# Altium PCB PCB.PcbDoc
Units mil, origin at the board's own origin, x right, y up, seen from the top; angles counter-clockwise.
Board outline 3505 x 2360 mil, 2 copper layers (Top Layer, Bottom Layer); 33 components, 18 nets, 124 pads, 0 vias.
Unrouted connection lines stored in the file: 62.
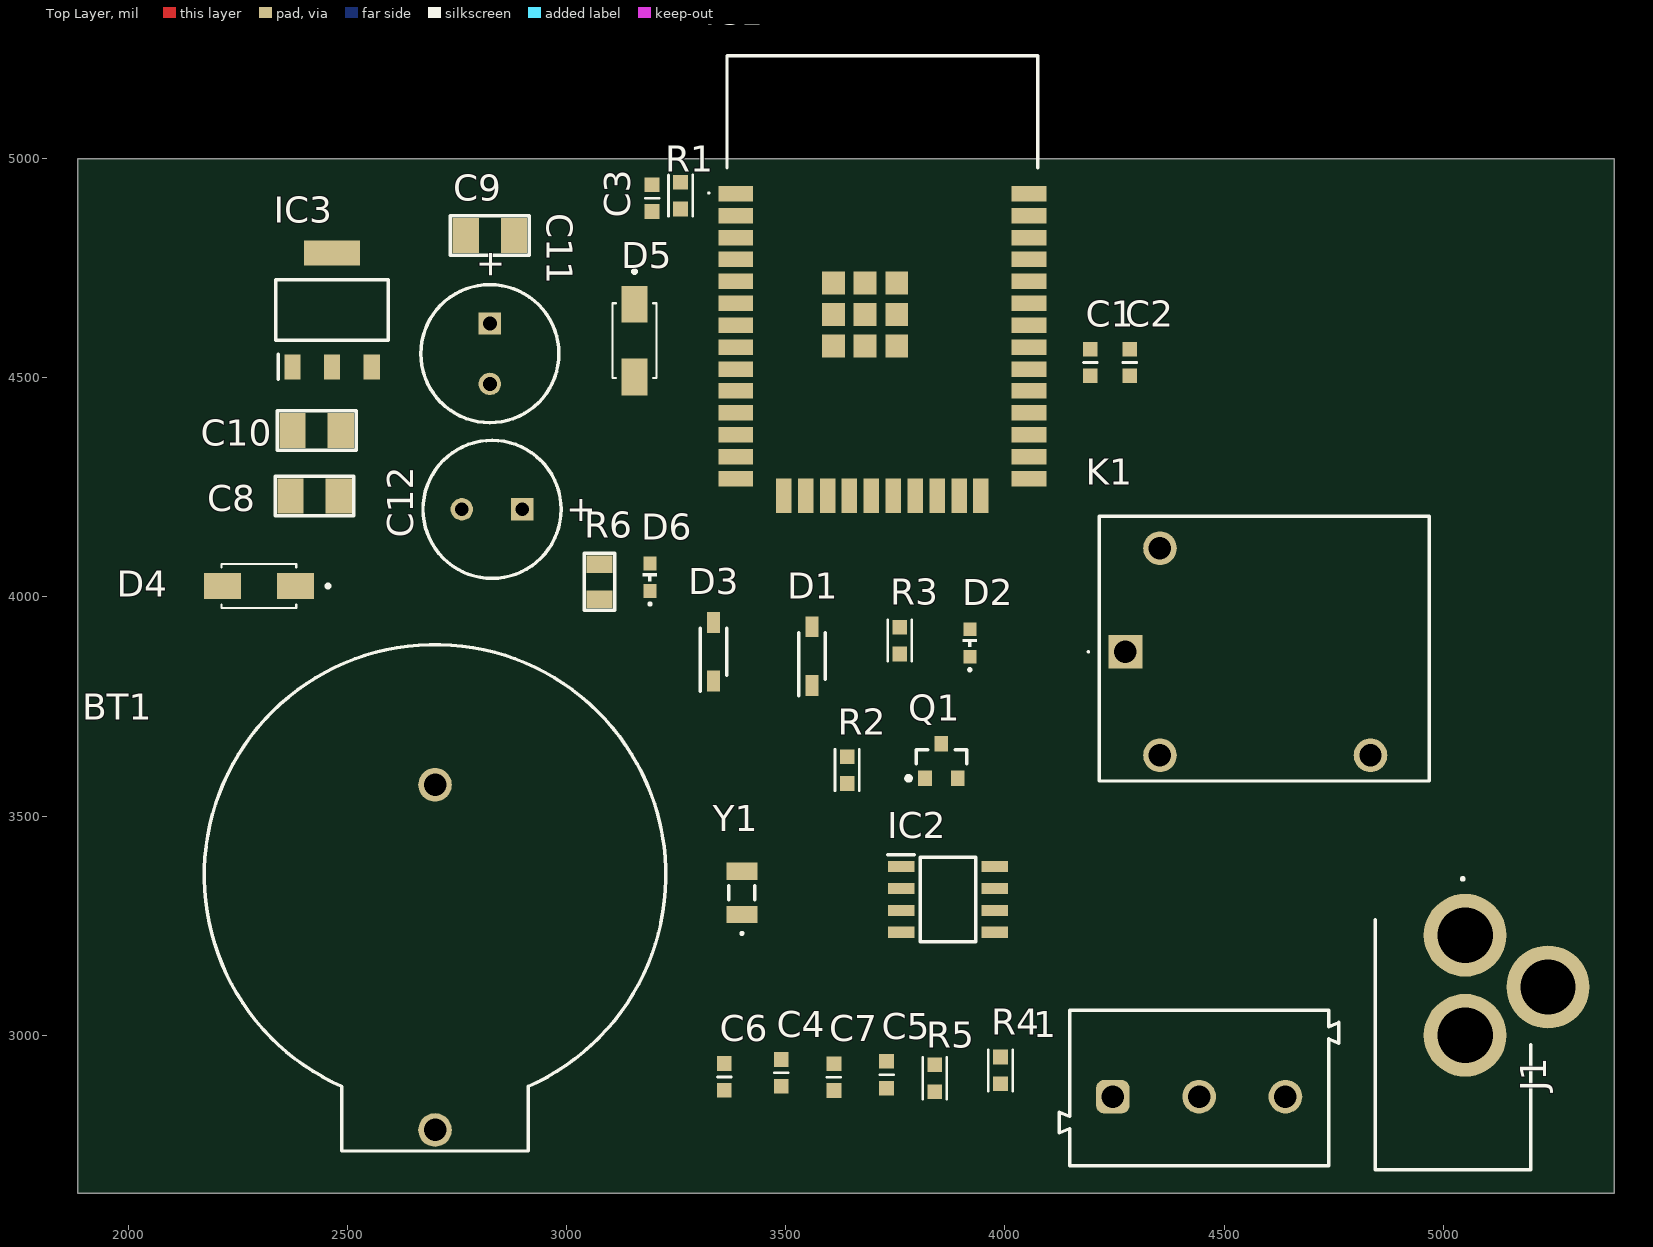
[diagram p0: Top Layer view]
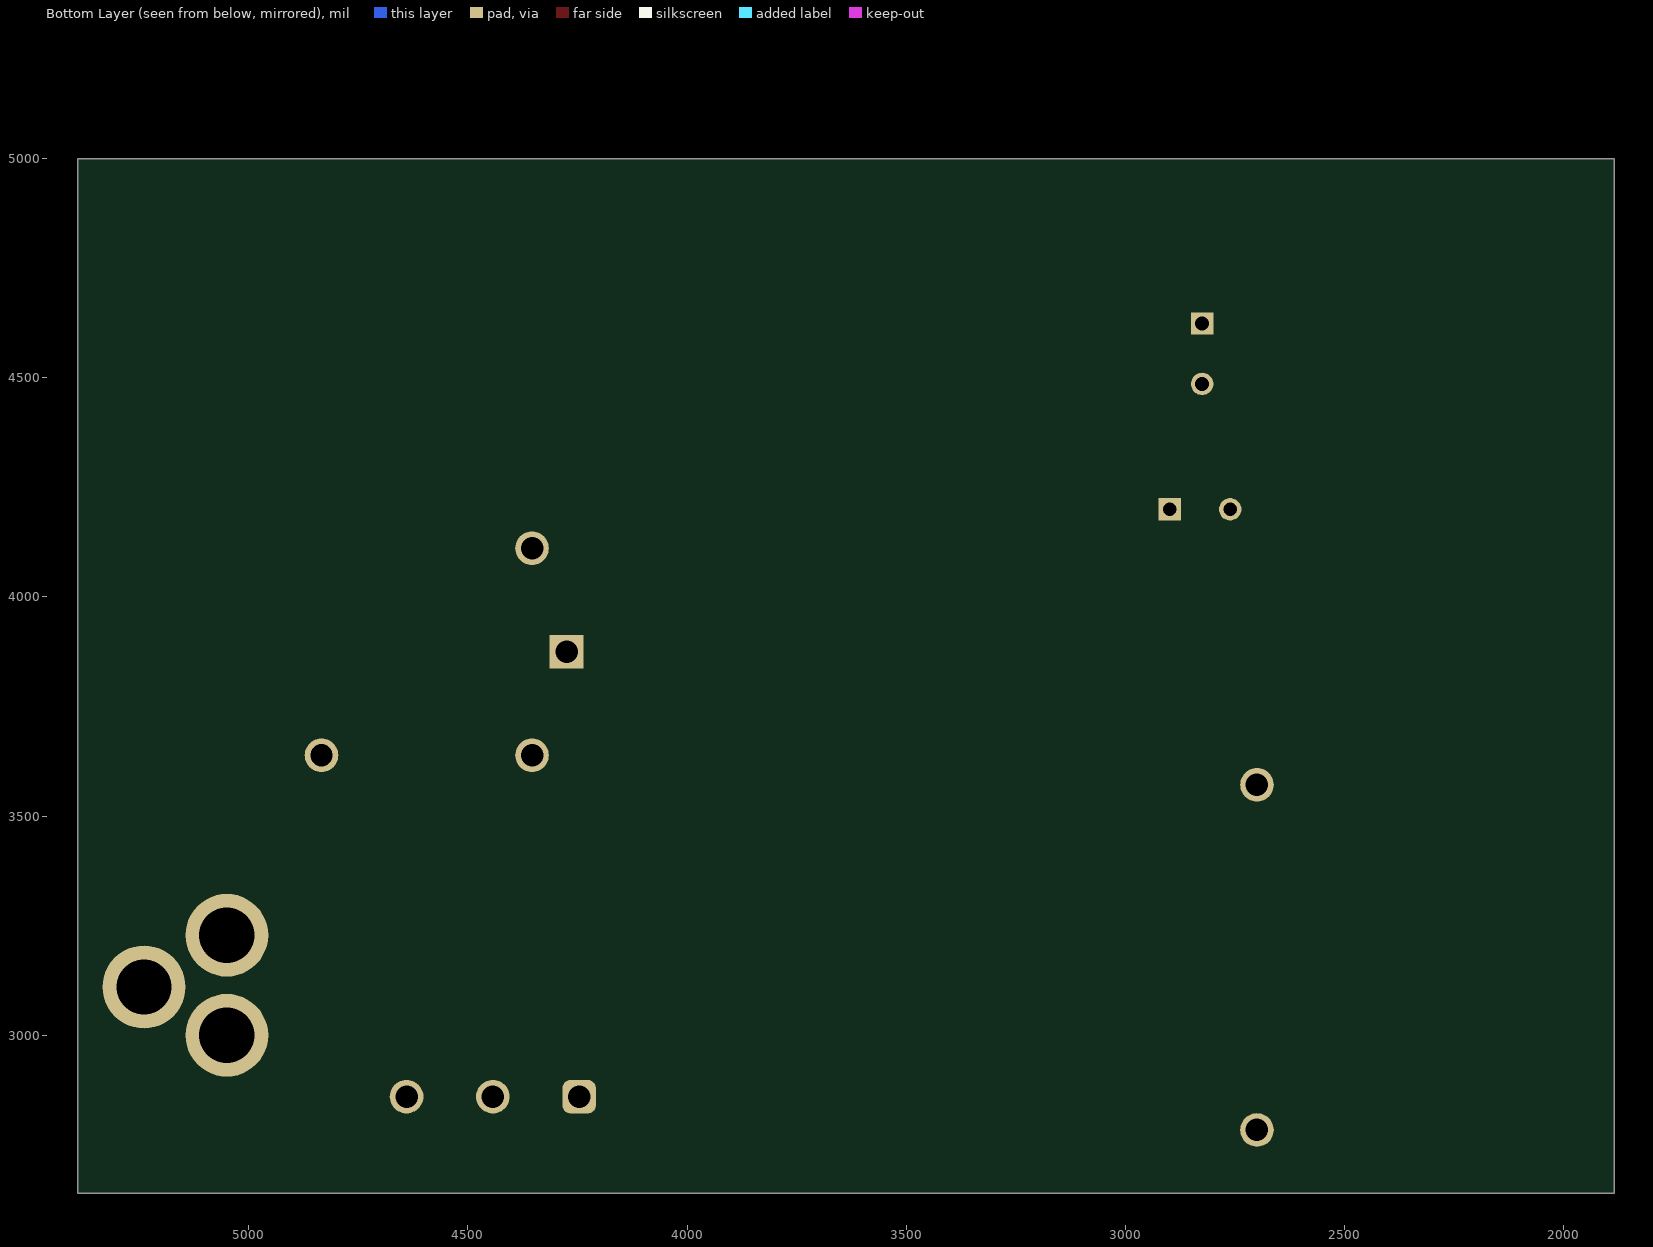
[diagram p1: Bottom Layer view, seen from below]

## Layer stack, top to bottom
Top Solder: solder mask 0.4, Solder Resist, Dk 3.5
Top Layer: signal copper 1.4
Dielectric 1: dielectric 12.6, FR-4, Dk 4.8
Bottom Layer: signal copper 1.4
Bottom Solder: solder mask 0.4, Solder Resist, Dk 3.5

## Board outline
1885,2640 5390,2640 5390,5000 1885,5000

## Design rules (kind name [scope] priority, off if disabled: settings)
Clearance [All] p1: gap=10 ignorepadtopadclearanceinfootprint=FALSE except(0: Arc-Hole Track-Hole SMDPad-Hole THPad-Hole Via-Hole Fill-Hole Poly-Hole Region-Hole Text-Hole)
PolygonConnect [All] p1: connectstyle=Relief reliefconductorwidth=10 reliefentries=4 polygonreliefangle="90 Angle" airgapwidth=10
RoutingVias [All] p1: holewidth=28 width=50 viastyle="Through Hole" minholewidth=28 minwidth=50 maxholewidth=28 maxwidth=50
SolderMaskExpansion [All] p1: expansion=4 istentingtop=FALSE
Width [All] p1: maxlimit=10 minlimit=10 preferedwidth=10
30 further rules are at their usual default settings.

## Classes and differential pairs
component class "relay and rtc": 1 BT1 C4 C5 C6 C7 D1 D2 D3 IC2 K1 Q1 R2 R3 R4 R5 Y1
component class "power supply": C8 C9 C10 C11 C12 D4 D5 D6 IC3 J1 R6
component class main: C1 C2 C3 IC1 R1

## Components (designator, comment, footprint, x,y, rotation, side; value= is the part's Value field where it differs from the comment)
1 "691101710003" 691101710003 4443.16,2879.69 r0 top
BT1 "79578211" 79578211 2700,3365 r90 top
C1 "22µF" SMD-0603C 4195,4535 r180 top
C2 "0.10µF" SMD-0603C 4285,4535 r180 top
C3 "0.10µF" SMD-0603C 3195,4910 r180 top
C4 "0.10µF" SMD-0603C 3490,2914.49 r0 top
C5 "10µF" SMD-0603C 3730,2910 r0 top
C6 "10pF" SMD-0603C 3360,2905 r0 top
C7 "10pF" SMD-0603C 3610,2904.49 r0 top
C8 "104" SMD-1206C 2425,4230 r270 top value=0.033µF
C9 "10pF" SMD-1206C 2825,4825 r90 top value=0.033µF
C10 "100nF" SMD-1206C 2430,4380 r270 top value=0.033µF
C11 "25V/470uF" WCAP-ATUL_8x11.5x3.5 2825,4555 r90 top value="220 uF"
C12 "25V/470uF" WCAP-ATUL_8x11.5x3.5 2830,4200 r0 top value="220 uF"
D1 "1N4148W-7-F" SOD3716X145N 3560,3865 r90 top
D2 "Red, 2V, 140°" WL-SMCD_0603 3920,3895 r90 top
D3 "1N4148W-7-F" SOD3716X145N 3335,3875 r90 top
D4 "SS14" DIOM4325X250N 2298.27,4025 r180 top
D5 "TVS5V" DIOM4325X250N 3155,4585 r270 top
D6 "Red, 2V, 140°" WL-SMCD_0603 3190,4045 r90 top
IC1 "ESP32-WROOM-32E-H4" ESP32WROOM32UEM113EH2800UH3Q0 3720.35,4732.6 r0 top
IC2 "MCP79402T-I_SN" SOIC127P600X175-8N 3870,3310 r0 top
IC3 "AMS1117-3.3" SOT229P700X180-4N 2465,4655 r90 top
J1 "694106301002" 694106301002_1 5199.61,2692.91 r90 top
K1 "AZ943-1AH-12DE" AZ9431AH12DE 4275,3875 r0 top
Q1 "BC847ALT1" ONSC-SOT-23-3-318-08_V 3855,3625.63 r90 top
R1 "10k" SMD-0603-RES 3260,4915.51 r180 top
R2 "1k" SMD-0603-RES 3640,3605 r0 top
R3 "10k" SMD-0603-RES 3760,3900.51 r0 top
R4 "4.7k" SMD-0603-RES 3990,2920 r0 top
R5 "4.7k" SMD-0603-RES 3840,2902 r0 top
R6 "1K" SMD-0805-RES 3075,4035 r180 top value=1
Y1 "SC32S-7PF20PPM" SC32S7PF20PPM 3400,3325 r90 top

## Footprints (in the part's own frame and the unit in brackets; to place one, negate y for a bottom-side part, rotate by r counter-clockwise, add the part's x,y. Pads: shape width x height; smd on the part's side, far side on the other; paste and mask are expansions set on the pad)
79578211 [mm] "Battery Holder"
  round 1.95 hole 1.3: 1(-14.755,0) 2(5.245,0)
  silkscreen extent -15.97,-13.37 13.37,13.37, body extent -15.97,-13.38 13.33,13.37, height 9.6
691101710003 [mm] "5,00mm - modular - blue - Horizontal entry with pressure clamp - 12,6mm height - 03p"
  rrect50% 1.95x1.95 hole 1.3: 1(-5,-0.5)
  round 1.95 hole 1.3: 2(0,-0.5) 3(5,-0.5)
  silkscreen extent -8.1,-4.5 8.1,4.5, body extent -8.1,-4.5 8.1,4.5, height 12.65
694106301002_1 [mm]
  round 4.8 hole 3.2: 1(13.6,3.8) 2(7.8,3.8) 3(10.6,-1)
  silkscreen extent 0,0 16.93,9, body extent 0.12,-1.22 14.62,8.28, height 11.02
AZ9431AH12DE [mm]
  rect 1.95x1.95 hole 1.3: 1(0,0)
  round 1.95 hole 1.3: 2(2,-6) 3(14.2,-6) 5(2,6)
  silkscreen extent -2.2,-7.49 17.6,7.86, body extent -1.53,-7.49 17.6,7.86, height 16.05
DIOM4325X250N [mm]
  rect 2.12x1.5 smd: A(2.115,0) C(-2.115,0)
  silkscreen extent -4.1,-1.28 2.16,1.28
ESP32WROOM32UEM113EH2800UH3Q0 [mm]
  rect 2x0.9 smd: 1(-8.5,4.76) 2(-8.5,3.49) 3(-8.5,2.22) 4(-8.5,0.95) 5(-8.5,-0.32) 6(-8.5,-1.59) 7(-8.5,-2.86) 8(-8.5,-4.13) 9(-8.5,-5.4) 10(-8.5,-6.67) 11(-8.5,-7.94) 12(-8.5,-9.21) 13(-8.5,-10.48) 14(-8.5,-11.75) 25(8.5,-11.75) 26(8.5,-10.48) 27(8.5,-9.21) 28(8.5,-7.94) 29(8.5,-6.67) 30(8.5,-5.4) 31(8.5,-4.13) 32(8.5,-2.86) 33(8.5,-1.59) 34(8.5,-0.32) 35(8.5,0.95) 36(8.5,2.22) 37(8.5,3.49) 38(8.5,4.76)
  rect 0.9x2 smd: 15(-5.715,-12.75) 16(-4.445,-12.75) 17(-3.175,-12.75) 18(-1.905,-12.75) 19(-0.635,-12.75) 20(0.635,-12.75) 21(1.905,-12.75) 22(3.175,-12.75) 23(4.445,-12.75) 24(5.715,-12.75)
  rect 1.33x1.33 smd: 39(-1,-2.24) 40(-2.835,-4.075) 41(-1,-4.075) 42(0.835,-4.075) 43(0.835,-2.24) 44(0.835,-0.405) 45(-1,-0.405) 46(-2.835,-0.405) 47(-2.835,-2.24)
  silkscreen extent -10.1,4.75 9,12.75, body extent -9,-13.25 9,5.95, height 3.2
ONSC-SOT-23-3-318-08_V [mm] "SOT23, 3-Leads, Body 2.92x1.3mm, Pitch 0.95mm"
  rect 0.9x0.8 smd: 1(-1,0.95) 2(-1,-0.95) 3(1,0)
  silkscreen extent -1.12,-1.46 0.65,2.02, body extent -0.65,-1.46 0.65,1.46, height 1.11
SC32S7PF20PPM [mm]
  rect 1x1.8 smd: 1(-1.25,0) 2(1.25,0)
  silkscreen extent -2.4,-0.75 0.4,0.75, body extent -1.65,-0.8 1.65,0.8, height 0.84
SMD-0603-RES [mm]
  rect 0.85x0.85 smd: 1(0,0.775) 2(0,-0.775)
  silkscreen extent -0.7,-1.2 0.7,1.2, body extent -0.4,-0.85 0.4,0.85, height 0.56
SMD-0603C [mm]
  rect 0.85x0.85 smd: 1(0,0.775) 2(0,-0.775)
  silkscreen extent -0.4,0 0.4,0, body extent -0.4,-0.8 0.4,0.8, height 0.9
SMD-0805-RES [mil]
  rect 60x40 smd: 1(0,40) 2(0,-40)
  silkscreen extent -35,-65 35,65, body extent -24,-39 26,39, height 31
SMD-1206C [mil]
  rect 80x60 smd: 1(0,55) 2(0,-55)
  silkscreen extent -45,-90 45,90, body extent -31,-63 32,63, height 39
SOD3716X145N [mm]
  rect 1.2x0.75 smd: 1(-1.7,0) 2(1.7,0)
  silkscreen extent -2.3,-0.77 1.35,0.77, body extent -1.85,-0.77 1.85,0.77, height 1.45
SOIC127P600X175-8N [mm]
  rect 1.525x0.65 smd: 1(-2.712,1.905) 2(-2.712,0.635) 3(-2.712,-0.635) 4(-2.712,-1.905) 5(2.712,-1.905) 6(2.712,-0.635) 7(2.712,0.635) 8(2.712,1.905)
  silkscreen extent -3.47,-2.45 1.6,2.58, body extent -3,-2.45 3,2.45, height 1.75
SOT229P700X180-4N [mm]
  rect 1.45x0.95 smd: 1(-3.3,2.29) 2(-3.3,0) 3(-3.3,-2.29)
  rect 1.45x3.25 smd: 4(3.3,0)
  silkscreen extent -4.03,-3.25 1.75,3.25, body extent -3.35,-3.15 3.35,3.15, height 1.8
WCAP-ATUL_8x11.5x3.5 [mm] "Aluminum Electrolytic Capacitors, 8x11.5mm"
  rect 1.3x1.3 hole 0.8: 1(1.75,0)
  round 1.3 hole 0.8: 2(-1.75,0)
  silkscreen extent -4,-4 4,4, body extent -3.99,-4 4,4, height 11.81
WL-SMCD_0603 [mm] "SMD Mono-color Chip LED, body 1.6x0.8mm"
  rect 0.8x0.75 smd: 1(-0.8,0) 2(0.8,0)
  silkscreen extent -1.62,-0.4 0.22,0.4, body extent -0.8,-0.4 0.8,0.4, height 0.42

## Part data
1: "WR-TBL Series 101 Horizontal Entry Modular, THT, pitch 5mm, 3p", Manufacturer="Wurth Elektronik", Operating Temperature Max=105°C, Operating Temperature Min=-40°C, Rated Current=16A, Working Voltage=250V, Application="Pressure Clamp", Category="Terminal Blocks", ComponentLink1Description="Website Link", ComponentLink1URL=https://www.we-online.com/redexpert/article/691101710003?ad, ComponentLink2Description="Datasheet Link", ComponentLink2URL=https://www.we-online.com/redexpert/spec/691101710003?ad, Manufacturer Part Number=691101710003, Match Code=WR-TBL, Modularity=Yes, Mount="Through Hole", Number of Pins=3, Number of Rows=1, Orientation=Horizontal, Packaging=Box, Pitch=5mm
BT1: "WA-BCPH Battery Holder, THT, Battery Type 2450", Operating Temperature="-40 to +105degC", Battery Type=2450, ComponentLink1Description=Manufacturer, ComponentLink1URL=http://www.we-online.de, ComponentLink2Description=Datasheet, ComponentLink2URL=https://katalog.we-online.com/em/datasheet/79578211.pdf, Mounting Technology=THT, Packaging=Bag, Part Number=79578211, Published Date="September 2019", Publisher="Wurth Elektronik"
C1: library part GRM188R61A226ME15D, "CAP CER 22UF 10V X5R 0603", Digi-Key Part Number=490-10476-1-ND, Manufacturer="Murata Electronics North America", Operating Temperature="-55°C ~ 85°C", Package / Case="0603 (1608 Metric)", Ratings=-, Temperature Coefficient=X5R, Tolerance=±20%, Voltage=10V, @ qty=0, Applications="General Purpose", Datasheets=http://www.murata.com/~/media/webrenewal/support/library/catalog/products/capacitor/mlcc/c02e.pdf, Factory Stock=0, Features="Derating Recommended", Height - Seated (Max)=-, Image=//media.digikey.com/Renders/Murata%20Renders/ZRB-SERIES-0402.jpg, Lead Spacing=-, Lead Style=-, Minimum Quantity=1, Mounting Type="Surface Mount, MLCC", Packaging="Cut Tape (CT)", Part Number=GRM188R61A226ME15D, Part Status=Active, Quantity Available=179406, Series=GRM, Size / Dimension="0.063\" L x 0.031\" W (1.60mm x 0.80mm)", Thickness (Max)="0.039\" (1.00mm)", Unit Price (USD)=0.24
C2 C3 C4: library part GCJ188R71C104KA01D, "CAP CER 0.1UF 16V X7R 0603", Digi-Key Part Number=490-5796-1-ND, Manufacturer="Murata Electronics North America", Operating Temperature="-55°C ~ 125°C", Package / Case="0603 (1608 Metric)", Ratings=AEC-Q200, Temperature Coefficient=X7R, Tolerance=±10%, Voltage=16V, @ qty=0, Applications="Automotive, Boardflex Sensitive", Datasheets=http://www.murata.com/~/media/webrenewal/support/library/catalog/products/capacitor/mlcc/c03e.ashx, Factory Stock=0, Features="Soft Termination", Height - Seated (Max)=-, Image=//media.digikey.com/Renders/Murata%20Renders/0603%28LQG18%29.jpg, Lead Spacing=-, Lead Style=-, Minimum Quantity=1, Mounting Type="Surface Mount, MLCC", Packaging="Cut Tape (CT)", Part Number=GCJ188R71C104KA01D, Part Status=Active, Quantity Available=22473, Series=GCJ, Size / Dimension="0.063\" L x 0.031\" W (1.60mm x 0.80mm)", Thickness (Max)="0.035\" (0.90mm)", Unit Price (USD)=0.21
C5: library part GRM185R60J106ME15D, "CAP CER 10UF 6.3V X5R 0603", Digi-Key Part Number=490-10467-1-ND, Manufacturer="Murata Electronics North America", Operating Temperature="-55°C ~ 85°C", Package / Case="0603 (1608 Metric)", Ratings=-, Temperature Coefficient=X5R, Tolerance=±20%, Voltage=6.3V, @ qty=0, Applications="General Purpose", Datasheets=http://www.murata.com/~/media/webrenewal/support/library/catalog/products/capacitor/mlcc/c02e.pdf, Factory Stock=0, Features="Derating Recommended", Height - Seated (Max)=-, Image=//media.digikey.com/Renders/Murata%20Renders/ZRB-SERIES-0402.jpg, Lead Spacing=-, Lead Style=-, Minimum Quantity=1, Mounting Type="Surface Mount, MLCC", Packaging="Cut Tape (CT)", Part Number=GRM185R60J106ME15D, Part Status=Active, Quantity Available=25068, Series=GRM, Size / Dimension="0.063\" L x 0.031\" W (1.60mm x 0.80mm)", Thickness (Max)="0.022\" (0.55mm)", Unit Price (USD)=0.36
C6 C7: library part GCM1885C1H100FA16D, "CAP CER 10PF 50V NP0 0603", Digi-Key Part Number=490-12530-1-ND, Manufacturer="Murata Electronics North America", Operating Temperature="-55°C ~ 125°C", Package / Case="0603 (1608 Metric)", Ratings=AEC-Q200, Temperature Coefficient="C0G, NP0", Tolerance=±1%, Voltage=50V, @ qty=0, Applications=Automotive, Datasheets=http://psearch.en.murata.com/capacitor/product/GCM1885C1H100FA16%23.pdf, Factory Stock=0, Features=-, Height - Seated (Max)=-, Image=//media.digikey.com/Renders/Murata%20Renders/0603%28GCM188%29.jpg, Lead Spacing=-, Lead Style=-, Minimum Quantity=1, Mounting Type="Surface Mount, MLCC", Packaging="Cut Tape (CT)", Part Number=GCM1885C1H100FA16D, Part Status=Active, Quantity Available=652, Series=GCM, Size / Dimension="0.063\" L x 0.031\" W (1.60mm x 0.80mm)", Thickness (Max)="0.035\" (0.90mm)", Unit Price (USD)=0.11
C8: library part GC331AD72E333KX01D, "CAP CER 0.033UF 250V X7T 1206", Digi-Key Part Number=490-13989-1-ND, Manufacturer="Murata Electronics North America", Operating Temperature="-55°C ~ 125°C", Package / Case="1206 (3216 Metric)", Ratings=AEC-Q200, Temperature Coefficient=X7T, Tolerance=±10%, Voltage=250V, @ qty=0, Applications=Automotive, Datasheets=http://search.murata.co.jp/Ceramy/image/img/A01X/G101/ENG/GC331AD72E333KX01-01.pdf, Factory Stock=0, Features=-, Height - Seated (Max)=-, Image=//media.digikey.com/Renders/Murata%20Renders/1206(GC3)320x160.jpg, Lead Spacing=-, Lead Style=-, Minimum Quantity=1, Mounting Type="Surface Mount, MLCC", Packaging="Cut Tape (CT)", Part Number=GC331AD72E333KX01D, Part Status=Active, Quantity Available=3999, Series=GC3, Size / Dimension="0.126\" L x 0.063\" W (3.20mm x 1.60mm)", Thickness (Max)="0.039\" (1.00mm)", Unit Price (USD)=0.33
C9: library part GC331AD72E333KX01D, "CAP CER 10PF 50V NP0 1206", Digi-Key Part Number=490-13989-1-ND, Manufacturer="Murata Electronics North America", Operating Temperature="-55°C ~ 125°C", Package / Case="1206 (3216 Metric)", Ratings=AEC-Q200, Temperature Coefficient=X7T, Tolerance=±10%, Voltage=250V, @ qty=0, Applications=Automotive, Datasheets=http://search.murata.co.jp/Ceramy/image/img/A01X/G101/ENG/GC331AD72E333KX01-01.pdf, Factory Stock=0, Features=-, Height - Seated (Max)=-, Image=//media.digikey.com/Renders/Murata%20Renders/1206(GC3)320x160.jpg, Lead Spacing=-, Lead Style=-, Minimum Quantity=1, Mounting Type="Surface Mount, MLCC", Packaging="Cut Tape (CT)", Part Number=GC331AD72E333KX01D, Part Status=Active, Quantity Available=3999, Series=GC3, Size / Dimension="0.126\" L x 0.063\" W (3.20mm x 1.60mm)", Thickness (Max)="0.039\" (1.00mm)", Unit Price (USD)=0.33
C10: library part GC331AD72E333KX01D, "CAP CER 0.1UF 50V X7R 1206", Digi-Key Part Number=490-13989-1-ND, Manufacturer="Murata Electronics North America", Operating Temperature="-55°C ~ 125°C", Package / Case="1206 (3216 Metric)", Ratings=AEC-Q200, Temperature Coefficient=X7T, Tolerance=±10%, Voltage=250V, @ qty=0, Applications=Automotive, Datasheets=http://search.murata.co.jp/Ceramy/image/img/A01X/G101/ENG/GC331AD72E333KX01-01.pdf, Factory Stock=0, Features=-, Height - Seated (Max)=-, Image=//media.digikey.com/Renders/Murata%20Renders/1206(GC3)320x160.jpg, Lead Spacing=-, Lead Style=-, Minimum Quantity=1, Mounting Type="Surface Mount, MLCC", Packaging="Cut Tape (CT)", Part Number=GC331AD72E333KX01D, Part Status=Active, Quantity Available=3999, Series=GC3, Size / Dimension="0.126\" L x 0.063\" W (3.20mm x 1.60mm)", Thickness (Max)="0.039\" (1.00mm)", Unit Price (USD)=0.33
C11 C12: library part 860040474004, "WCAP-ATUL Aluminum Electrolytic Capacitors, 8x11.5mm, 25 Vdc, 220 uF", Operating Temperature="-40 °C up to +105 °C", Rated Voltage="25 Vdc", ComponentLink1Description=Manufacturer, ComponentLink1URL=http://www.we-online.de, ComponentLink2Description=Datasheet, ComponentLink2URL=http://katalog.we-online.com/pbs/datasheet/860040474004.pdf, Life Cycle=7000h, Part Number=860040474004, Published Date="Sep. 2017", Publisher="Wurth Elektronik", Size=8x11.5mm
D1 D3: "Diode", Manufacturer_Name="Diodes Incorporated", Mouser Part Number=621-1N4148W-F, Arrow Part Number=1N4148W-7-F, Arrow Price/Stock=https://www.arrow.com/en/products/1n4148w-7-f/diodes-incorporated?region=nac, Datasheet Link=https://componentsearchengine.com/Datasheets/2/1N4148W-7-F.pdf, Height=1.45mm, Manufacturer_Part_Number=1N4148W-7-F, Mouser Price/Stock=https://www.mouser.co.uk/ProductDetail/Diodes-Incorporated/1N4148W-7-F?qs=LHX0FizJzg7Ae9ZM8LTAWw%3D%3D
D2 D6: library part 150060RS55040, "WL-SMCD Mono-color Chip LED Diffused, SMT, size 0603, Red, 2V, 140°", Case/Size Code=0603, Emitting Color=Red, Forward Voltage=2V, Manufacturer="Wurth Elektronik", Operating Temperature Max=85°C, Operating Temperature Min=-40°C, Category="Signal LEDs", Chip Technology=AlInGaP, ComponentLink1Description="Website Link", ComponentLink1URL=https://www.we-online.com/redexpert/article/150060RS55040?ad, ComponentLink2Description="Datasheet Link", ComponentLink2URL=https://www.we-online.com/redexpert/spec/150060RS55040?ad, Dominant Wavelength=624nm, Height=0.4mm, Length=1.6mm, Luminous Intensity=90mcd, Manufacturer Part Number=150060RS55040, Match Code=WL-SMCD, Mount="Surface Mount", Packaging="Tape and Reel", Peak Wavelength=632nm, Viewing Angle=140°, Width=0.8mm
D4: Package=None, Availability=Unavailable, MP=SS14, Price=None
D5: library part SS14, Package=None, Availability=Unavailable, MP=SS14, Price=None
IC1: "Integrated Circuit", Manufacturer_Name="Espressif Systems", Mouser Part Number=356-ESP32WRM320EH3PS, Datasheet Link=https://www.espressif.com/sites/default/files/documentation/esp32-wroom-32e_esp32-wroom-32ue_datasheet_en.pdf, Height=3.25mm, Manufacturer_Part_Number=ESP32-WROOM-32E-H4, Mouser Price/Stock=https://www.mouser.co.uk/ProductDetail/Espressif-Systems/ESP32-WROOM-32E-H4?qs=Li%252BoUPsLEnuUxeqGSCz%252BcA%3D%3D
IC2: "Integrated Circuit", Arrow Part Number=MCP79402T-I/SN, Manufacturer_Name=Microchip, Mouser Part Number=579-MCP79402TISN, Arrow Price/Stock=https://www.arrow.com/en/products/mcp79402t-isn/microchip-technology?region=nac, Datasheet Link=https://componentsearchengine.com/Datasheets/1/MCP79402T-I_SN.pdf, Height=1.75mm, Manufacturer_Part_Number=MCP79402T-I/SN, Mouser Price/Stock=https://www.mouser.co.uk/ProductDetail/Microchip-Technology/MCP79402T-I-SN/?qs=ggQiQSXuoRU4tW%252BtaaWOXQ%3D%3D
IC3: "Integrated Circuit", Manufacturer_Name=Advanced, Datasheet Link=https://datasheet.datasheetarchive.com/originals/distributors/Datasheets-28/DSA-550594.pdf, Height=1.8mm, Manufacturer_Part_Number=AMS1117-3.3
J1: "Connector", Manufacturer_Name="Wurth Elektronik", Mouser Part Number=710-694106301002, Datasheet Link=https://datasheet.datasheetarchive.com/originals/distributors/Datasheets_SAMA/1c153bd2ba42bb51bda59ee4cd9765cd.pdf, Manufacturer_Part_Number=694106301002, Mouser Price/Stock=https://www.mouser.co.uk/ProductDetail/Wurth-Elektronik/694106301002?qs=a9WhcLg8qCwOEkcI62k5mA%3D%3D
K1: "Relay or Contactor", Manufacturer_Name="Zettler Group", Datasheet Link=https://www.azettler.com/pdfs/az943.pdf, Height=15.95mm, Manufacturer_Part_Number=AZ943-1AH-12DE
Q1: "General Purpose Transistor, NPN Silicon, 3-Pin SOT-23, Tape and Reel", Manufacturer="On Semiconductor", Supplier Part Number 1=BC847ALT1OSCT-ND, ComponentLink1Description="Manufacturer URL", ComponentLink1URL=http://www.onsemi.com/, ComponentLink2Description=Datasheet, ComponentLink2URL=http://www.onsemi.cn/pub_link/Collateral/BC846ALT1-D.PDF, ComponentLink3Description="Package Specification", ComponentLink3URL=http://www.onsemi.cn/pub_link/Collateral/318-08.PDF, DatasheetVersion="Rev. 11", fT Min (MHz)=100, IC Continuous (A)=0.1, Mounting Technology="Surface Mount", PackageDescription="3-Pin Small Outline Transistor, Body 2.92 x 1.3 mm, Pitch 0.95 mm", PackageReference=SOT-23-3-318-08, PackageVersion="Rev. AP, 11/2009", Packing="Tape and Reel", PartNumber=BC847ALT1, Polarity=NPN, ROHS=FALSE, Supplier 1=Digi-Key
R1 R3: library part ERJ-3EKF1002V, "RES SMD 10K OHM 1% 1/10W 0603", Digi-Key Part Number=P10.0KHCT-ND, Manufacturer="Panasonic Electronic Components", Operating Temperature="-55°C ~ 155°C", Package / Case="0603 (1608 Metric)", Power (Watts)="0.1W, 1/10W", Supplier Device Package=0603, Temperature Coefficient=±100ppm/°C, Tolerance=±1%, @ qty=1500, Composition="Thick Film", Datasheets=http://industrial.panasonic.com/www-cgi/jvcr13pz.cgi?E+PZ+3+AOA0002+ERJ3EKF1002V+7+WW, Factory Stock=0, Failure Rate=-, Features="Automotive AEC-Q200", Height - Seated (Max)="0.022\" (0.55mm)", Image=//media.digikey.com/Photos/Panasonic%20Photos/MFG_ERJ-P6W%20Series.jpg, Minimum Quantity=1, Number of Terminations=2, Packaging="Cut Tape (CT)", Part Number=ERJ-3EKF1002V, Part Status=Active, Quantity Available=6703141, Series=ERJ, Size / Dimension="0.063\" L x 0.031\" W (1.60mm x 0.80mm)", Unit Price (USD)=0.00379
R2: library part ERJ-3EKF1001V, "RES SMD 1K OHM 1% 1/10W 0603", Digi-Key Part Number=P1.00KHCT-ND, Manufacturer="Panasonic Electronic Components", Operating Temperature="-55°C ~ 155°C", Package / Case="0603 (1608 Metric)", Power (Watts)="0.1W, 1/10W", Supplier Device Package=0603, Temperature Coefficient=±100ppm/°C, Tolerance=±1%, @ qty=1500, Composition="Thick Film", Datasheets=http://industrial.panasonic.com/www-cgi/jvcr13pz.cgi?E+PZ+3+AOA0002+ERJ3EKF1001V+7+WW, Factory Stock=0, Failure Rate=-, Features="Automotive AEC-Q200", Height - Seated (Max)="0.022\" (0.55mm)", Image=//media.digikey.com/Photos/Panasonic%20Photos/MFG_ERJ-P6W%20Series.jpg, Minimum Quantity=1, Number of Terminations=2, Packaging="Cut Tape (CT)", Part Number=ERJ-3EKF1001V, Part Status=Active, Quantity Available=5218845, Series=ERJ, Size / Dimension="0.063\" L x 0.031\" W (1.60mm x 0.80mm)", Unit Price (USD)=0.00379
R4: library part ERJ-3EKF4701V, "RES SMD 4.7K OHM 1% 1/10W 0603", Digi-Key Part Number=P4.70KHCT-ND, Manufacturer="Panasonic Electronic Components", Operating Temperature="-55°C ~ 155°C", Package / Case="0603 (1608 Metric)", Power (Watts)="0.1W, 1/10W", Supplier Device Package=0603, Temperature Coefficient=±100ppm/°C, Tolerance=±1%, @ qty=1500, Composition="Thick Film", Datasheets=http://industrial.panasonic.com/www-cgi/jvcr13pz.cgi?E+PZ+3+AOA0002+ERJ3EKF4701V+7+WW, Factory Stock=0, Failure Rate=-, Features="Automotive AEC-Q200", Height - Seated (Max)="0.022\" (0.55mm)", Image=//media.digikey.com/Photos/Panasonic%20Photos/MFG_ERJ-P6W%20Series.jpg, Minimum Quantity=1, Number of Terminations=2, Packaging="Cut Tape (CT)", Part Number=ERJ-3EKF4701V, Part Status=Active, Quantity Available=999380, Series=ERJ, Size / Dimension="0.063\" L x 0.031\" W (1.60mm x 0.80mm)", Unit Price (USD)=0.00379
R5: library part ERJ-3GEYJ472V, "RES SMD 4.7K OHM 5% 1/10W 0603", Digi-Key Part Number=P4.7KGCT-ND, Manufacturer="Panasonic Electronic Components", Operating Temperature="-55°C ~ 155°C", Package / Case="0603 (1608 Metric)", Power (Watts)="0.1W, 1/10W", Supplier Device Package=0603, Temperature Coefficient=±200ppm/°C, Tolerance=±5%, @ qty=1500, Composition="Thick Film", Datasheets=http://industrial.panasonic.com/www-cgi/jvcr13pz.cgi?E+PZ+3+AOA0001+ERJ3GEYJ472V+7+WW, Factory Stock=0, Failure Rate=-, Features="Automotive AEC-Q200", Height - Seated (Max)="0.022\" (0.55mm)", Image=//media.digikey.com/Photos/Panasonic%20Photos/MFG_ERJ-P6W%20Series.jpg, Minimum Quantity=1, Number of Terminations=2, Packaging="Cut Tape (CT)", Part Number=ERJ-3GEYJ472V, Part Status=Active, Quantity Available=683531, Series=ERJ, Size / Dimension="0.063\" L x 0.031\" W (1.60mm x 0.80mm)", Unit Price (USD)=0.00321
R6: library part ERJ-6BQF1R0V, "RES SMD 1 OHM 1% 1/3W 0805", Digi-Key Part Number=P17499CT-ND, Manufacturer="Panasonic Electronic Components", Operating Temperature="-55°C ~ 125°C", Package / Case="0805 (2012 Metric)", Power (Watts)="0.333W, 1/3W", Supplier Device Package=0805, Temperature Coefficient=±200ppm/°C, Tolerance=±1%, @ qty=1500, Composition="Thick Film", Datasheets=https://industrial.panasonic.com/cdbs/www-data/pdf/RDA0000/AOA0000C239.pdf, Factory Stock=0, Failure Rate=-, Features="Automotive AEC-Q200, Current Sense", Height - Seated (Max)="0.028\" (0.70mm)", Image=//media.digikey.com/Renders/Panasonic%20Renders/ERJ-0805%20Pkg.jpg, Minimum Quantity=1, Number of Terminations=2, Packaging="Cut Tape (CT)", Part Number=ERJ-6BQF1R0V, Part Status=Active, Quantity Available=808, Series=ERJ, Size / Dimension="0.079\" L x 0.049\" W (2.00mm x 1.25mm)", Unit Price (USD)=0.05834
Y1: "Crystal or Oscillator", Manufacturer_Name="Seiko Semiconductors", Mouser Part Number=628-SC32S-7PF20PPM, Datasheet Link=https://www.mouser.com/datasheet/2/360/file_PRODUCT_MASTER_50812_GRAPHIC03-542305.pdf, Manufacturer_Part_Number=SC32S-7PF20PPM, Mouser Price/Stock=https://www.mouser.co.uk/ProductDetail/Seiko-Semiconductors/SC32S-7PF20PPM?qs=3CPZD7qAgigZSR1ASVAS6w%3D%3D

## Nets (pads, with @x,y where several pads share a name; then routed paths per layer and width w, separated by ;. In a path a pad name is that pad's centre, name@x,y a point inside that pad or via, vN(x,y) a via of type N, cw(c..) or ccw(c..) an arc to the next point about the centre after c; other vN are vias at no path point)
+3.3v: C1.1 C2.1 C4.1 C5.1 C9.1 C10.1 C11.1 D5.C IC1.2 IC2.8 IC3.2 R1.2 R4.1 R5.1 R6.1
+12v: C8.1 C12.1 D3.2 D4.C IC3.3
GND: BT1.2 C1.2 C2.2 C3.2 C4.2 C5.2 C6.2 C7.2 C8.2 C9.2 C10.2 C11.2 C12.2 D5.A D6.1 IC1.1 IC1.14 IC1.15 IC1.38 IC1.39 IC3.1 J1.2 J1.3 Q1.2 R3.1
Net1_1: 1.1 K1.1
Net1_2: 1.2 K1.3
NetBT1_1: BT1.1 IC2.3
NetC3_1: C3.1 IC1.3 R1.1
NetD1_1: D1.1 D3.1 K1.5
NetD1_2: D1.2 K1.2 Q1.3
NetD2_2: D2.2 R2.1
NetD4_A: D4.A J1.1
NetD6_2: D6.2 R6.2
NetQ1_1: Q1.1 R2.2 R3.2
PB4/RELAY: D2.1
SCLK: IC2.6 R4.2
SDA: IC2.5 R5.2
x1: C6.1 IC2.1 Y1.1
x2: C7.1 IC2.2 Y1.2
pads on no net: 1.3 IC1.4 IC1.5 IC1.6 IC1.7 IC1.8 IC1.9 IC1.10 IC1.11 IC1.12 IC1.13 IC1.16 IC1.17 IC1.18 IC1.19 IC1.20 IC1.21 IC1.22 IC1.23 IC1.24 IC1.25 IC1.26 IC1.27 IC1.28 IC1.29 IC1.30 IC1.31 IC1.32 IC1.33 IC1.34 IC1.35 IC1.36 IC1.37 IC1.40 IC1.41 IC1.42 IC1.43 IC1.44 IC1.45 IC1.46 IC1.47 IC2.4 IC2.7 IC3.4

## Text inside footprints (layer, text, board x,y; h text height)
C11: Top Overlay "+" at 2852.56,4724.29 h59.06 r90
C12: Top Overlay "+" at 2999.29,4172.44 h59.06